# Altium PCB NiMH Battery Charger Rev.PcbDoc
Units mil, origin at the board's own origin, x right, y up, seen from the top; angles counter-clockwise.
Board outline 1574.8 x 1574.8 mil, 2 copper layers (Top Layer, Bottom Layer); 36 components, 25 nets, 108 pads, 29 vias.
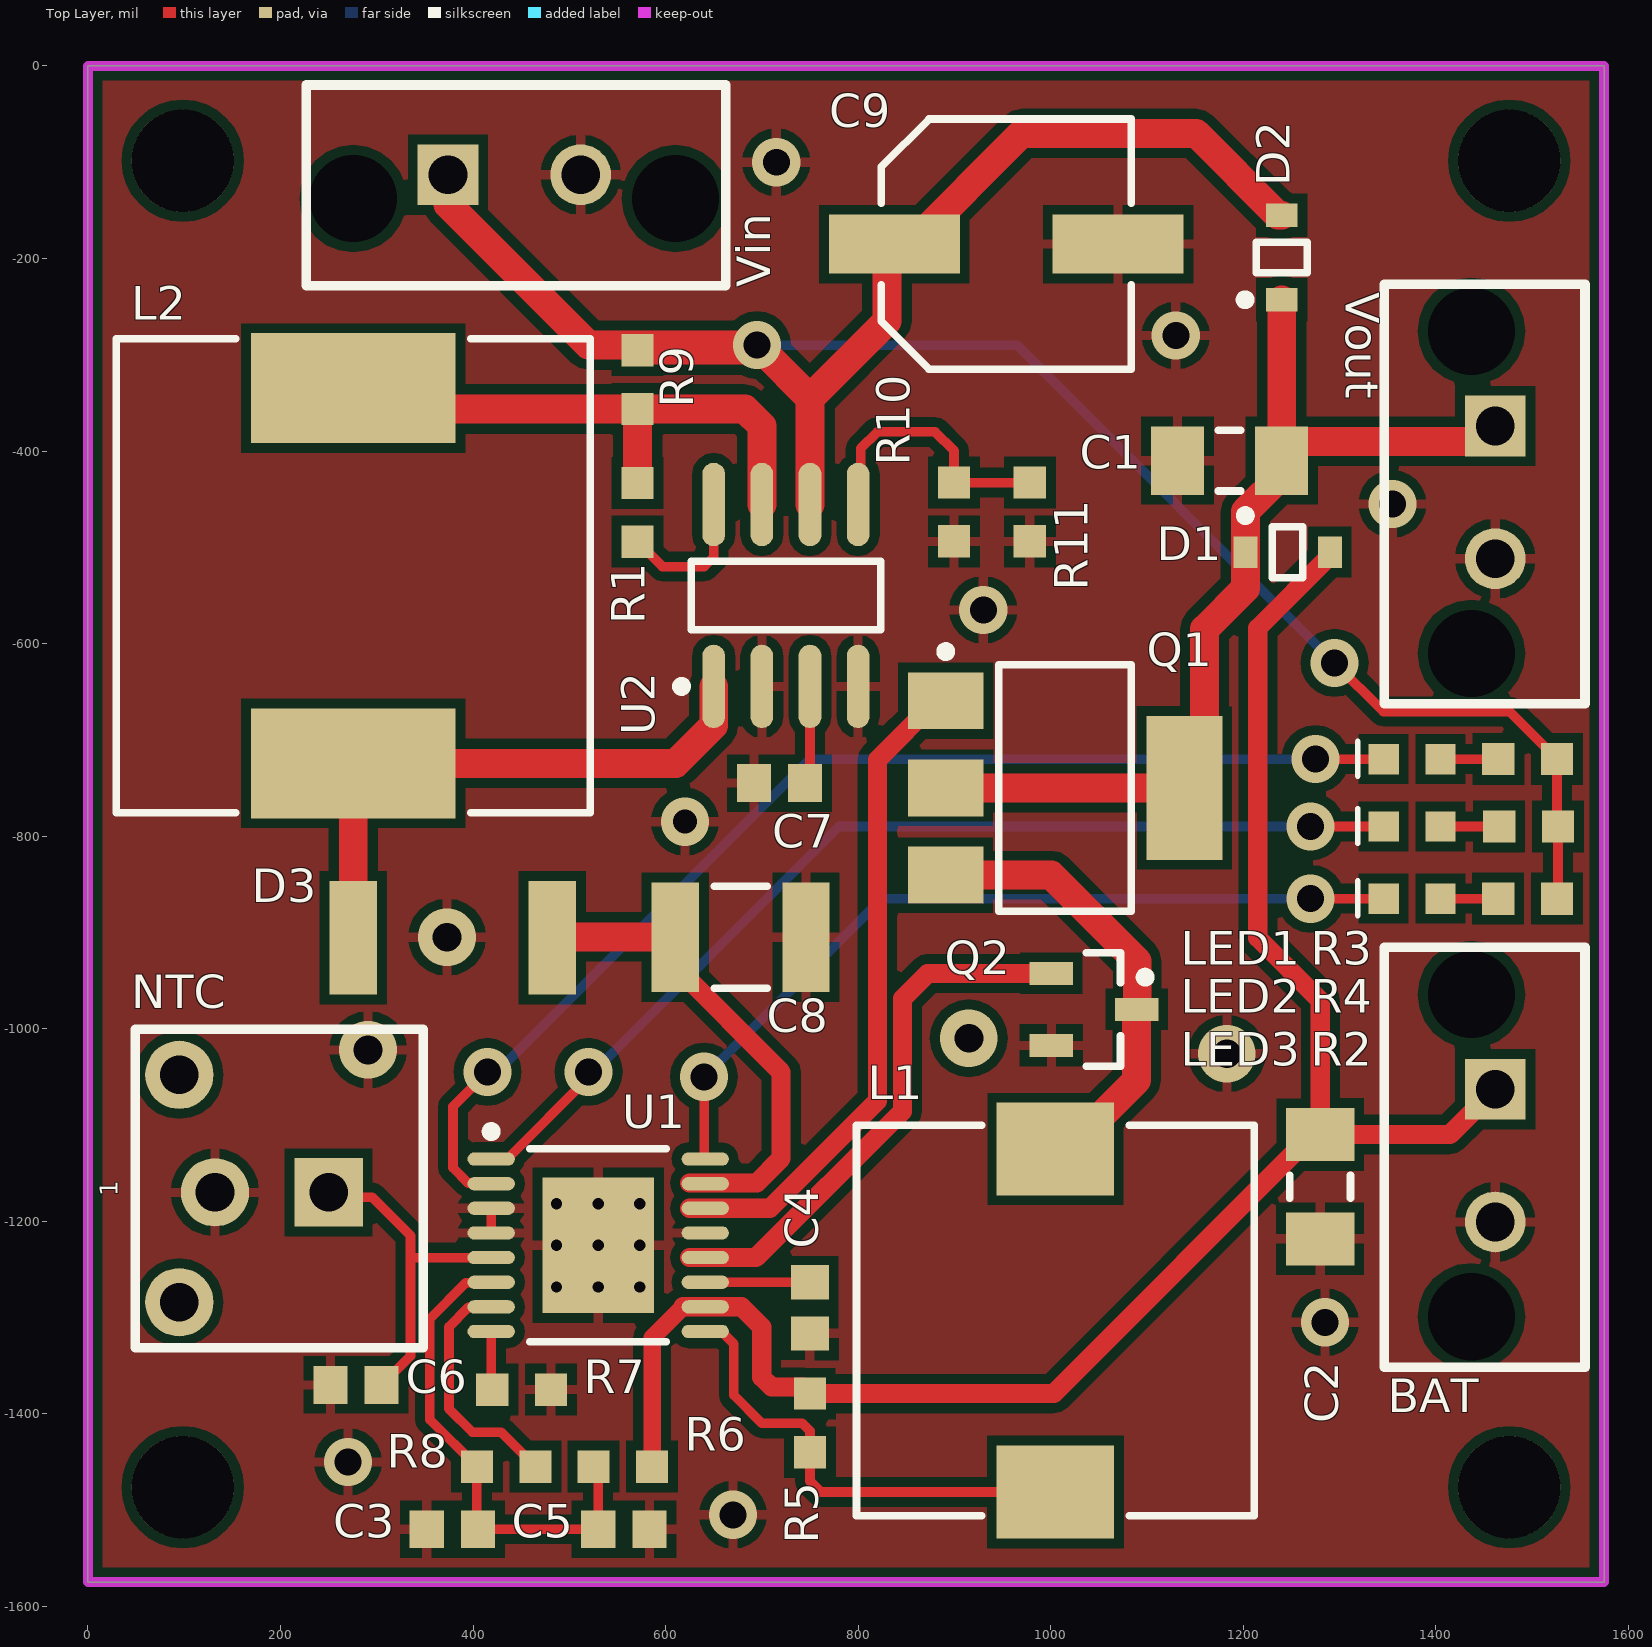
[diagram p0: Top Layer view]
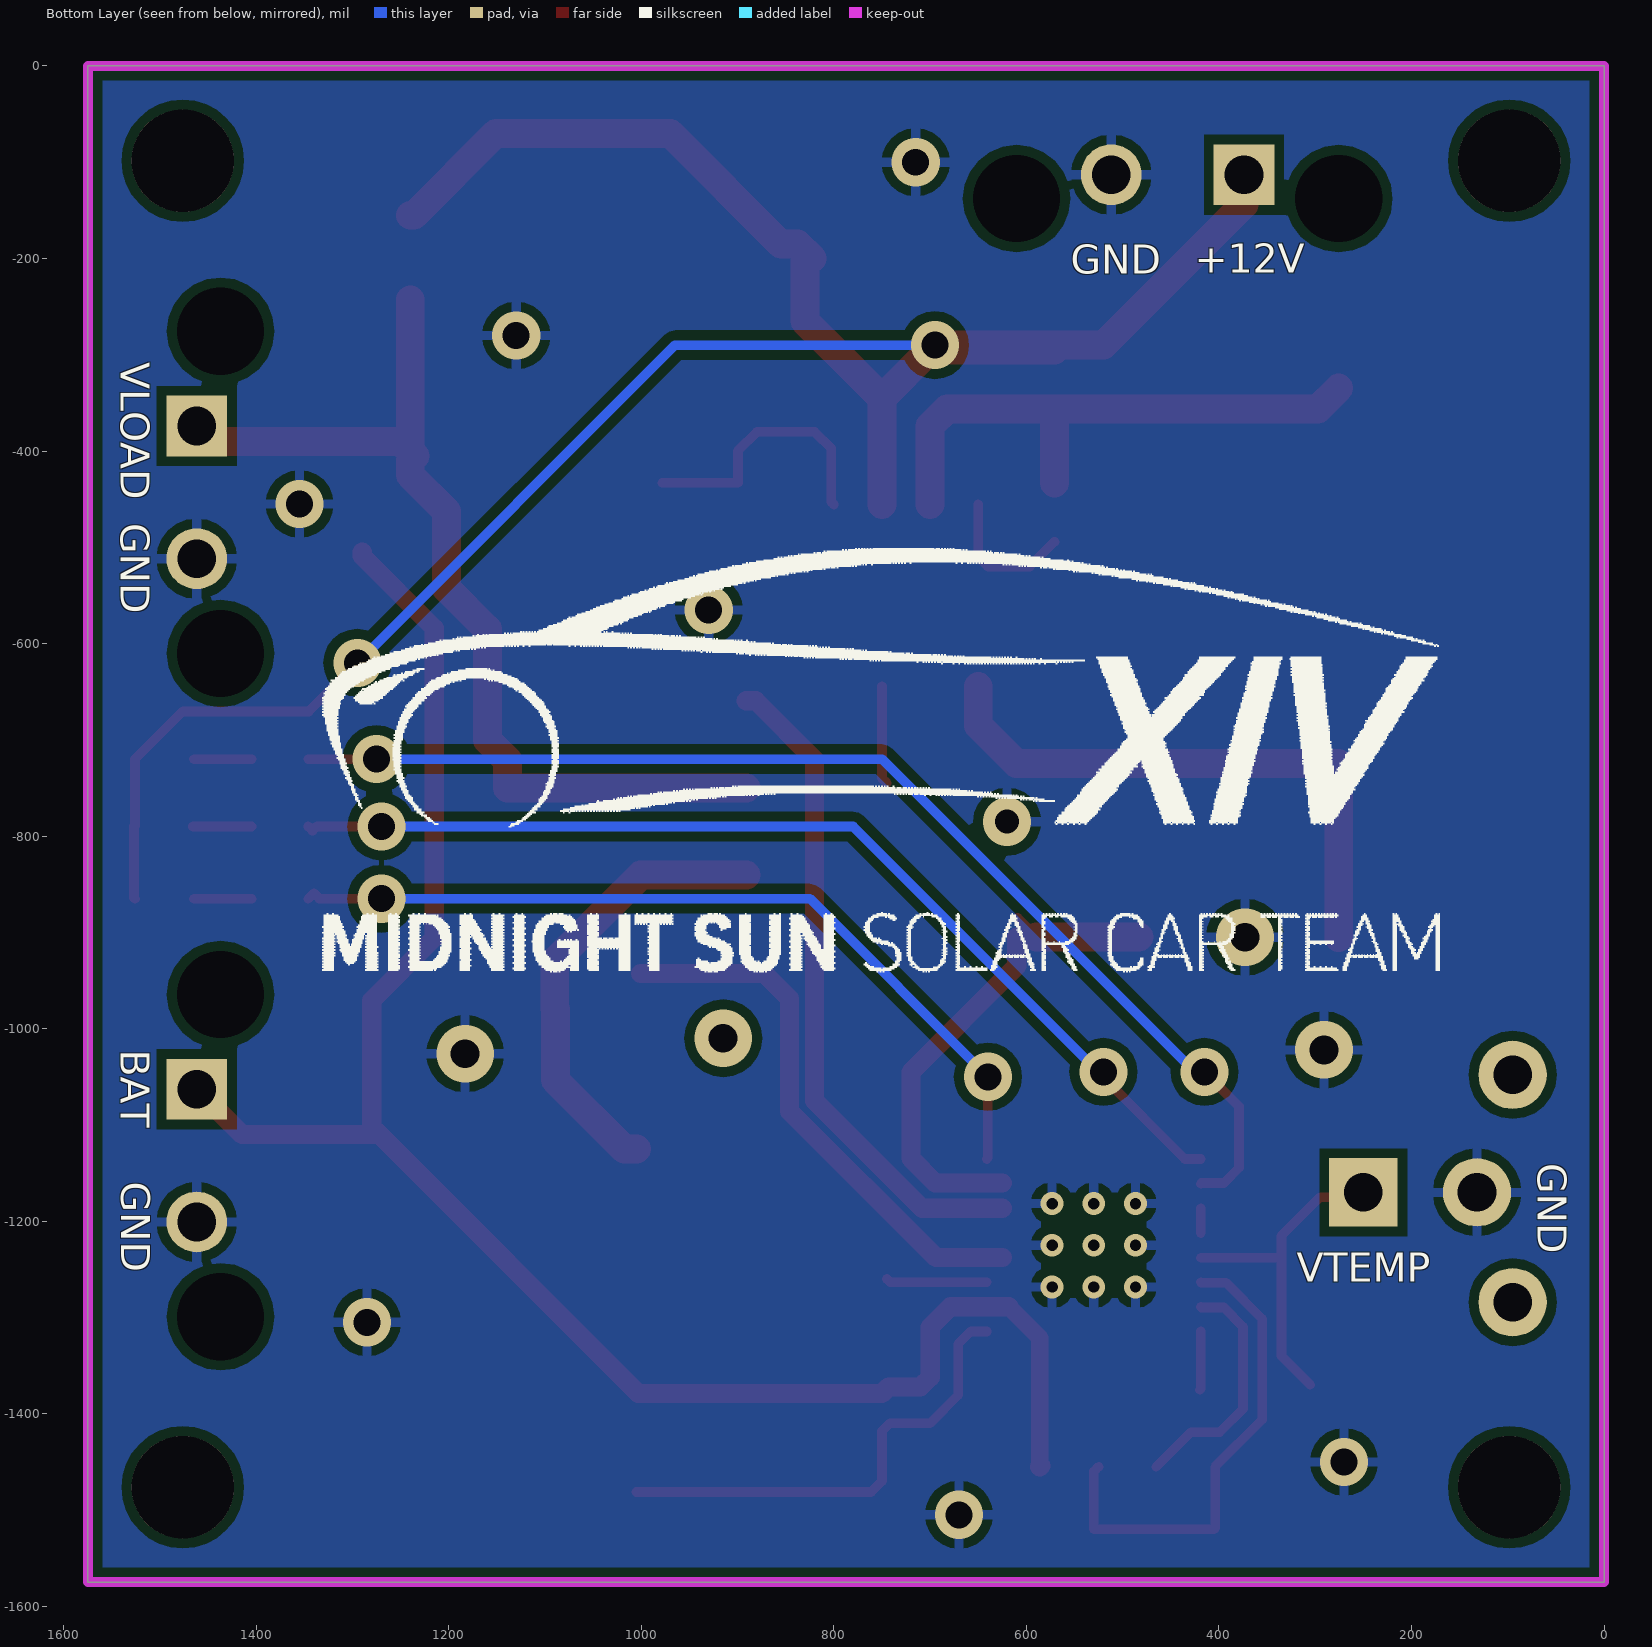
[diagram p1: Bottom Layer view, seen from below]
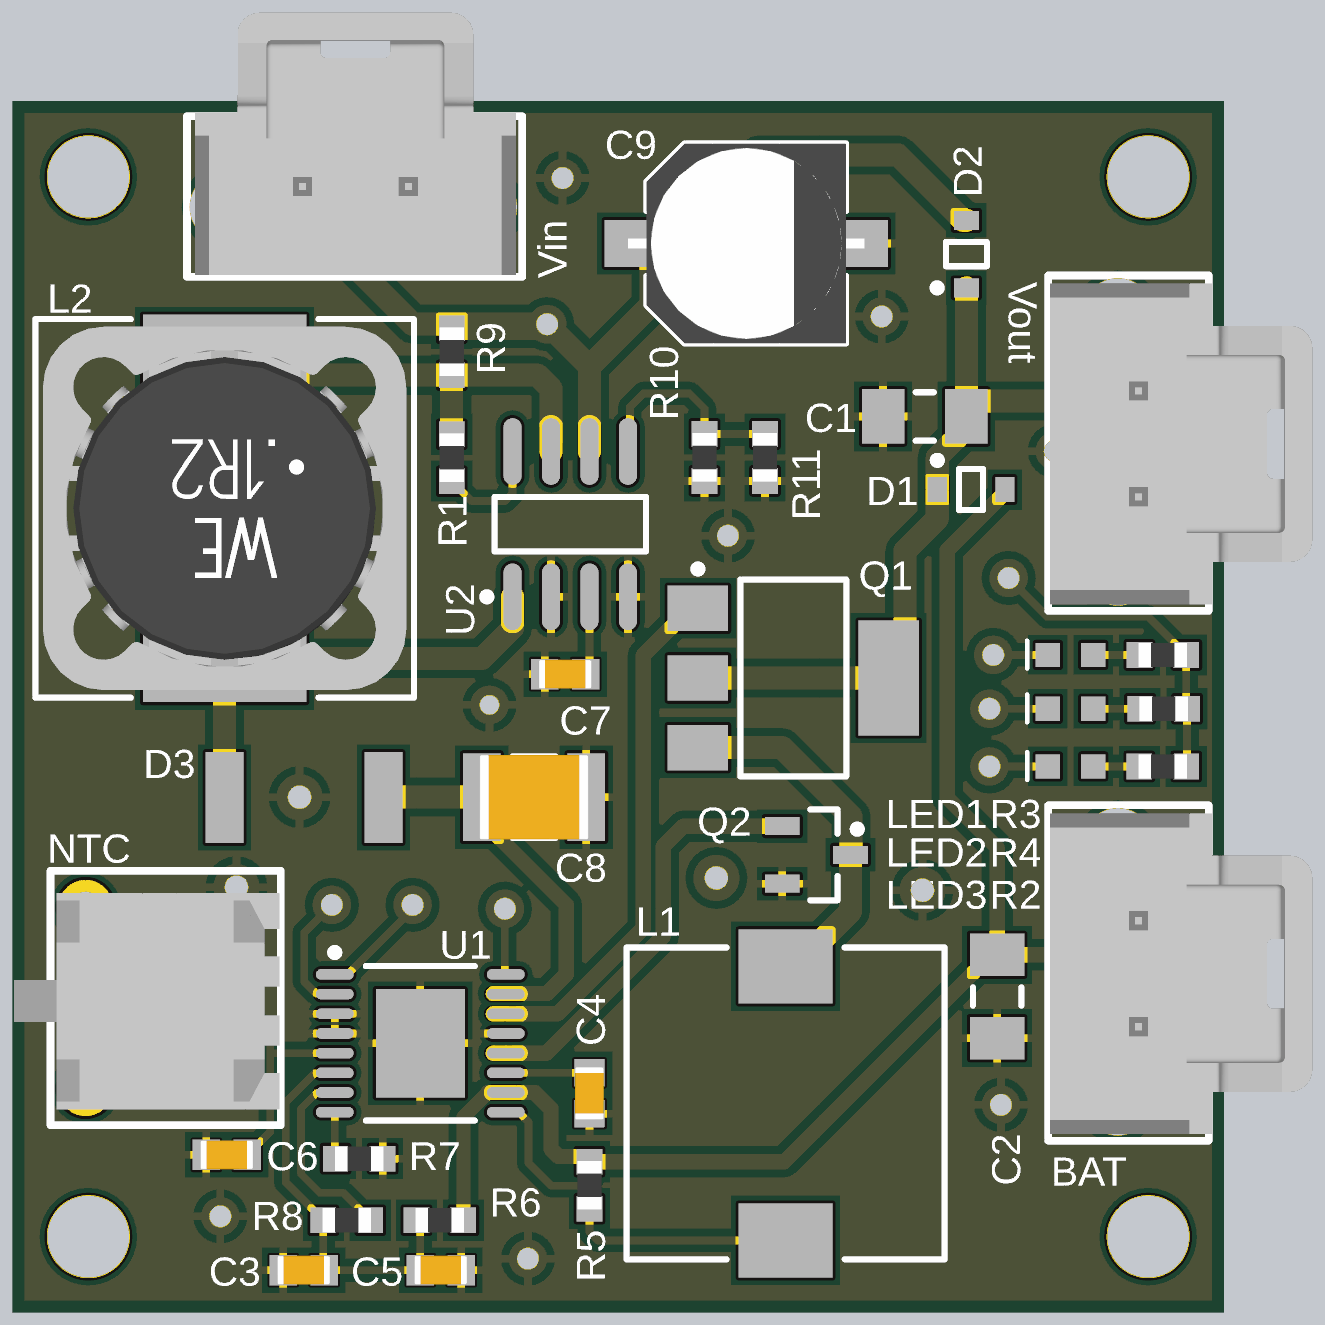
[diagram p2: 3D render of the assembled board from above, using the file's embedded part models]

## Layer stack, top to bottom
Top Solder: solder mask 0.4, Solder Resist, Dk 3.5
Top Layer: signal copper 1.4
Dielectric 1: dielectric 12.6, FR-4, Dk 4.8
Bottom Layer: signal copper 1.4
Bottom Solder: solder mask 0.4, Solder Resist, Dk 3.5

## Board outline
0,-1574.8 0,0 1574.8,0 1574.8,-1574.8

## Design rules (kind name [scope] priority, off if disabled: settings)
Clearance [All] p1: gap=10 ignorepadtopadclearanceinfootprint=FALSE except(0: Arc-Hole Track-Hole SMDPad-Hole THPad-Hole Via-Hole Fill-Hole Poly-Hole Region-Hole Text-Hole; 6: Arc-Arc Arc-Track Arc-SMDPad Track-Track Track-SMDPad SMDPad-SMDPad)
PolygonConnect [All] p1: connectstyle=Relief reliefconductorwidth=10 reliefentries=4 polygonreliefangle="90 Angle" airgapwidth=10
RoutingVias [All] p1: holewidth=28 width=50 viastyle="Through Hole" minholewidth=28 minwidth=50 maxholewidth=28 maxwidth=50
SolderMaskExpansion [All] p1: expansion=4
Width [All] p1: maxlimit=30 minlimit=10 preferedwidth=10 minimp=50.000000 maximp=50.000000 favimp=50.000000
30 further rules are at their usual default settings.

## Components (designator, comment, footprint, x,y, rotation, side; value= is the part's Value field where it differs from the comment)
BAT "CONN 2POS ULTRA-FIT 0.138\"" "CONN, 2POS ULTRA-FIT" 1461.81,-1062.99 r270 top (schematic designator P2)
C1 "CAP CER 10uF 50V 20% X5R 1206" "CAP, 1206" 1185.87,-410 r180 top
C2 "CAP CER 10uF 50V 20% X5R 1206" "CAP, 1206" 1280,-1164.13 r270 top
C3 "CAP CER 10nF 50V 5% X7R 0603" "CAP, 0603" 378.43,-1520 r180 top
C4 "CAP CER 0.1UF 50V 10% X7R 0603" "CAP, 0603" 750,-1290 r270 top
C5 "CAP CER 10nF 50V 5% X7R 0603" "CAP, 0603" 556.57,-1520 r0 top
C6 "68nF" "CAP, 0603" 278.43,-1370 r180 top
C7 "1500PF, 50V" "CAP, 0603" 718.43,-745 r180 top
C8 "CAP CER 330UF 6.3V X5R 1210" "CAP, 1210" 677.91,-905 r0 top
C9 "100UF" "CAP ALUM 6.3MM RADIAL SMD" 953.86,-185 r0 top
D1 "NSR1020MW2T3G" ONSC-SOD-323-2-477-02_V 1246.1,-505 r0 top
D2 "NSR1020MW2T3G" ONSC-SOD-323-2-477-02_V 1240,-198.9 r90 top
D3 "40V 1A" MELF 378.94,-905.51 r180 top
L1 "IND 10UH 2.8A 59 MOHM SMD" INDP100102X31N 1005,-1303.15 r270 top
L2 "180 µH" WE-PD-XL 275.59,-529.53 r270 top
LED1 "LED GREEN CLEAR 2V 0603" LED_0603 1403.03,-864.61 r180 top
LED2 "LED YELLOW CLEAR 2.1V 0603" LED_0603 1403.03,-719.61 r180 top
LED3 "LED RED CLEAR 2V 0603" LED_0603 1403.03,-789.61 r180 top
NTC "CONN 2POS MICRO-FIT 3mm" "CONN, 2POS MICRO-FIT" 250,-1166.06 r90 top (schematic designator P4)
Q1 "NTF2955T1G" ONSC-SOT-223-4-318E-04_V 1015,-750 r180 top
Q2 "20V 4A" SOT23 1045,-980 r0 top
R1 "180Ω" "RES, 0603" 570.87,-463.58 r90 top
R2 "RES 10K OHM 1% 1/10W 0603" "RES, 0603" 1495.43,-865.01 r180 top
R3 "RES 10K OHM 1% 1/10W 0603" "RES, 0603" 1495.51,-720 r180 top
R4 "RES 10K OHM 1% 1/10W 0603" "RES, 0603" 1496.46,-790.01 r180 top
R5 "0.05Ω" "RES, 0603" 750,-1409.49 r90 top
R6 "180k" "RES, 0603" 555.51,-1455 r0 top
R7 "49.9k" "RES, 0603" 450.51,-1375 r180 top
R8 "20k" "RES, 0603" 434.49,-1455 r180 top
R9 "0.22Ω" "RES, 0603" 570.87,-325.79 r270 top
R10 "2.21K" "RES, 0603" 899.57,-463.27 r270 top
R11 "47K" "RES, 0603" 978.31,-463.27 r270 top
U1 "LTC4010CFE#PBF" LT-FE-16-EPV-BC_L 530,-1225 r0 top
U2 "MC34063ACD-TR" SO8_N 725,-550 r90 top
Vin "CONN 2POS ULTRA-FIT 0.138\"" "CONN, 2POS ULTRA-FIT" 374.02,-112.99 r0 top (schematic designator P1)
Vout "CONN 2POS ULTRA-FIT 0.138\"" "CONN, 2POS ULTRA-FIT" 1461.81,-374.02 r270 top (schematic designator P3)

## Footprints (in the part's own frame and the unit in brackets; to place one, negate y for a bottom-side part, rotate by r counter-clockwise, add the part's x,y. Pads: shape width x height; smd on the part's side, far side on the other; paste and mask are expansions set on the pad)
"CAP ALUM 6.3MM RADIAL SMD" [mm] "Aluminum Electrolytic Capacitor, Body 6.50x6.50x5.50mm, IPC Low Density"
  rect 3.45x1.55 smd: 1(-2.95,0) 2(2.95,0)
  silkscreen extent -3.3,-3.3 3.3,3.3, body extent -3.9,-3.3 3.9,3.3, height 5.5
"CAP, 0603" [mm] "Chip Capacitor, 2-Leads, Body 1.60x0.81mm, IPC Medium Density"
  rect 0.9x1 smd mask+0.076: 1(-0.675,0) 2(0.675,0)
  body extent -0.87,-0.48 0.87,0.48, height 0.9
"CAP, 1206" [mm] "Chip Capacitor, 2-Leads, Body 3.20x1.60mm, IPC Medium Density"
  rect 1.4x1.8 smd: 1(-1.375,0) 2(1.375,0)
  silkscreen extent -0.3,-0.8 0.3,0.8, body extent -1.68,-0.87 1.67,0.87, height 1.8
"CAP, 1210" [mm] "Chip Capacitor, 2-Leads, Body 3.20x2.50mm, IPC Low Density"
  rect 1.25x2.9 smd: 1(-1.725,0) 2(1.725,0)
  silkscreen extent -0.7,-1.35 0.7,1.35, body extent -1.8,-1.4 1.8,1.4, height 2.8
"CONN, 2POS MICRO-FIT" [mm]
  round 1.8 hole 1.02: 0(-3,3.94) 0(3,3.94) 2(-0.1,3)
  rect 1.8x1.8 hole 1.02: 1(-0.1,0)
  silkscreen extent -4.2,-2.5 4.2,5.1, body extent -3.67,-2.47 3.48,6.3, height 9.95
"CONN, 2POS ULTRA-FIT" [mm] "2 Positions Header, Shrouded Connector 0.138\" (3.50mm) Through Hole Gold"
  rect 1.6x1.6 hole 1.02: 1(0,0)
  round 1.6 hole 1.02: 2(3.5,0)
  round 1.6 hole 2.3: ""(-2.5,-0.63) ""(6,-0.63)
  silkscreen extent -3.74,-2.93 7.33,2.37, body extent -3.48,-2.87 7.12,5.79, height 13.85
INDP100102X31N [mm] "Precision Wire Wound Inductor, 2-Leads, Body 10.00x10.20mm, IPC Medium Density"
  rect 2.45x3.1 smd: 1(-4.525,0) 2(4.525,0)
  silkscreen extent -5.15,-5.25 5.15,5.25, body extent -5.15,-5.25 5.15,5.25, height 3.1
LED_0603 [mm]
  rect 0.8x0.8 smd: 1(-0.05,0.01) 2(1.45,0.01)
  silkscreen extent 2.13,-0.46 2.13,0.45, body extent -0.09,-0.39 1.51,0.41, height 0.8
LT-FE-16-EPV-BC_L [mm] "SOP, 16-Leads, Body 5.1x4.5mm, Pitch 0.65mm, Thermal Pad 3.58x2.94mm, IPC High Density"
  oval 1.25x0.35 smd: 1(-2.825,2.275) 2(-2.825,1.625) 3(-2.825,0.975) 4(-2.825,0.325) 5(-2.825,-0.325) 6(-2.825,-0.975) 7(-2.825,-1.625) 8(-2.825,-2.275) 9(2.825,-2.275) 10(2.825,-1.625) 11(2.825,-0.975) 12(2.825,-0.325) 13(2.825,0.325) 14(2.825,0.975) 15(2.825,1.625) 16(2.825,2.275)
  rect 2.94x3.58 smd: 17(0,0)
  silkscreen extent -2.95,-2.55 1.8,3.12, body extent -2.25,-2.55 2.25,2.55, height 1.1
MELF [mm]
  rect 1.25x3 smd: 1(2.625,0) 2(-2.625,0)
ONSC-SOD-323-2-477-02_V [mm] "SOD, 2-Leads, Body 1.7x1.25mm"
  rect 0.63x0.83 smd: 1(-1.115,0) 2(1.115,0)
  silkscreen extent -1.24,-0.67 0.4,1.09, body extent -0.85,-0.63 0.85,0.63, height 1.06
ONSC-SOT-223-4-318E-04_V [mm] "SOT223, 4-Leads"
  rect 2x1.5 smd: 1(3.15,-2.3) 2(3.15,0) 3(3.15,2.3)
  rect 2x3.8 smd: 4(-3.15,0)
  silkscreen extent -1.75,-3.72 3.27,3.25, body extent -1.75,-3.25 1.75,3.25, height 1.75
"RES, 0603" [mm] "Chip Resistor, 2-Leads, Body 1.60x0.80mm, IPC Medium Density"
  rect 0.85x0.85 smd: 1(-0.775,0) 2(0.775,0)
  body extent -0.8,-0.4 0.8,0.4, height 0.55
SO8_N [mm] "SOIC, 8-Leads, Body 4.9x3.9mm, Pitch 1.27mm, IPC Medium Density"
  oval 2.2x0.6 smd: 1(-2.4,1.905) 2(-2.4,0.635) 3(-2.4,-0.635) 4(-2.4,-1.905) 5(2.4,-1.905) 6(2.4,-0.635) 7(2.4,0.635) 8(2.4,1.905)
  silkscreen extent -2.52,-2.5 0.9,2.88, body extent -2,-2.5 2,2.5, height 1.75
SOT23 [mm] "SOT23, 3-Leads, Body 2.9x1.3mm, Pitch 0.95mm, Lead Span 2.3mm - Reverse Pinning, IPC Medium Density"
  rect 1.15x0.6 smd: 1(1.125,0) 2(-1.125,-0.95) 3(-1.125,0.95)
  silkscreen extent -0.2,-1.5 1.48,1.5, body extent -0.7,-1.5 0.7,1.5, height 1.1
WE-PD-XL [mm] "SMD Inductor, 2-Leads, Body 12.0 x 12.0 mm"
  rect 2.9x5.4 smd: 1(-4.95,0) 2(4.95,0)
  silkscreen extent -6.25,-6.25 6.25,6.25, body extent -6,-6 6,6, height 7.99

## Part data
BAT Vin Vout: "Connector Header Through Hole 2 position 0.138\" (3.50mm)", Color=Black, Manufacturer=Molex, Manufacturer Part Number=1722871102, Supplier Part Number 1=WM11701-ND, ComponentLink1Description=http://www.molex.com/pdm_docs/sd/1722861302_sd.pdf, ComponentLink1URL=http://www.molex.com/pdm_docs/sd/1722861302_sd.pdf, Connector Type="Male Pin", Contact Plating=Tin, Fastening Type=Latch, Mount="Through Hole", Number of Positions=2, Number of Rows=1, Packaging=Tray, Pitch=0.138inch, Pricing 1="1 = 0.78000, 10 = 0.68800, 100 = 0.59380, 500 = 0.48582, 1000 = 0.43184, 5000 = 0.37786, 10000 = 0.35897 (USD)", RoHS=Yes, Series=UltraFit, Stock 1=2743, Supplier 1=Digi-Key, Termination=Solder
C1 C2: "10μF ±20% 50V Ceramic Capacitor X5R 1206 (3216 Metric)", Capacitance="10 uF", Case/Package=1206, Case Code (Metric)=3216, Manufacturer=Murata, Manufacturer Part Number=GRT31CR61H106ME01L, Max Operating Temperature=85°C, Min Operating Temperature=-55°C, Rating=X5R, Ratings=AEC-Q200, Supplier Part Number 1=490-12457-1-ND, Tolerance=20%, Voltage Rating=50V, Case Code (Imperial)=1206, Length=0.126inch, Mount="Surface Mount", Packaging="Tape and Reel", Pricing 1="1 = 0.57000, 10 = 0.39800, 100 = 0.23910, 500 = 0.17930, 1000 = 0.15141 (USD)", RoHS=Yes, Stock 1=449467, Supplier 1=Digi-Key, Thickness=0.071inch, Width=0.063inch
C3 C5: "10000pF ±5% 50V Ceramic Capacitor U2J 0603 (1608 Metric)", Capacitance=10000pF, Manufacturer 1=KEMET, Manufacturer Part Number 1=C0603C103J5JAC7867, Operating Temperature="-55°C ~ 125°C", Package / Case="0603 (1608 Metric)", Ratings=-, Supplier Part Number 1=399-13384-1-ND, Temperature Coefficient=U2J, Tolerance=±5%, Voltage=50V, ComponentLink1Description=http://www.kemet.com/docfinder?Partnumber=C0603C103J5JAC7867, ComponentLink1URL=http://www.kemet.com/docfinder?Partnumber=C0603C103J5JAC7867, Failure Rate=-, Height - Seated (Max)=-, Lead Spacing=-, Lead Style=-, Mounting Type="Surface Mount, MLCC", Packaging="Cut Tape (CT)", Part Status=Active, Size / Dimension="0.063\" L x 0.032\" W (1.60mm x 0.80mm)", Supplier 1=Digi-Key, Thickness (Max)="0.034\" (0.87mm)"
C4: "0.10μF ±10% 50V Ceramic Capacitor X7R 0603 (1608 Metric)", Capacitance=0.1μF, Manufacturer 1="AVX Corporation", Manufacturer Part Number 1=06035C104KAT2A, Operating Temperature="-55°C ~ 125°C", Package / Case="0603 (1608 Metric)", Ratings=-, Supplier Part Number 1=478-5052-1-ND, Temperature Coefficient=X7R, Tolerance=±10%, Voltage=50V, ComponentLink1Description=http://datasheets.avx.com/X7RDielectric.pdf, ComponentLink1URL=http://datasheets.avx.com/X7RDielectric.pdf, Height - Seated (Max)=-, Lead Spacing=-, Lead Style=-, Mounting Type="Surface Mount, MLCC", Packaging="Cut Tape (CT)", Part Status=Active, Size / Dimension="0.063\" L x 0.032\" W (1.60mm x 0.81mm)", Supplier 1=Digi-Key, Thickness (Max)="0.035\" (0.90mm)"
C6: library part "CAP CER 0.068UF 10% 50V X7R 0603", "0.068μF 50V Ceramic Capacitor X7R 0603 (1608 Metric) 0.063\" L x 0.032\" W (1.60mm x 0.80mm)", Case/Package=0603, Case Code (Metric)=1608, Dielectric=X7R, Manufacturer=Murata, Manufacturer Part Number=GCM188R71H683KA57D, Max Operating Temperature=125°C, Min Operating Temperature=-55°C, Package Quantity=4000, Supplier Part Number 1=490-8027-1-ND, Tolerance=10%, Voltage Rating=50V, Capacitance=68nF, Case Code (Imperial)=0603, ComponentLink1Description=https://datasheet.ciiva.com/29542/s0717e-29542427.pdf, ComponentLink1URL=https://datasheet.ciiva.com/29542/s0717e-29542427.pdf, ComponentLink2Description=https://datasheet.ciiva.com/29542/s0717e-29542428.pdf, ComponentLink2URL=https://datasheet.ciiva.com/29542/s0717e-29542428.pdf, ComponentLink3Description=https://datasheet.ciiva.com/29542/s0717e-29542429.pdf, ComponentLink3URL=https://datasheet.ciiva.com/29542/s0717e-29542429.pdf, Depth=0.8mm, Height=0.8mm, Length=1.6mm, Mount="Surface Mount", Packaging="Tape and Reel", Pricing 1="1=0.16, 10=0.116, 100=0.0547, 500=0.03832, 1000=0.03172 (USD)", Radiation Hardening=No, Stock 1=40000, Supplier 1=Digi-Key, Termination=SMD/SMT, Thickness=0.035inch, Voltage Rating (DC)=50V, Width=0.031inch
C7: library part "CAP, 1500PF, 50V, 10%, X7R, 0603", "KEMET - C0603C152K5RACTU - CAP, 1500PF, 50V, 10%, X7R, 0603", Capacitance=1.5nF, Case/Package=0603, Case Code (Metric)=1608, Dielectric=X7R, Dielectric Material=Ceramic, Manufacturer 1=KEMET, Manufacturer Part Number 1=C0603C152K5RACTU, Max Operating Temperature=125°C, Min Operating Temperature=-55°C, Package Quantity=1, Tolerance=10%, Voltage=50V, Case Code (Imperial)=0603, ComponentLink1Description=https://datasheet.ciiva.com/7824/kem-c1002-x7r-smd-7824006.pdf?src-supplier=Element14, ComponentLink1URL=https://datasheet.ciiva.com/7824/kem-c1002-x7r-smd-7824006.pdf?src-supplier=Element14, ComponentLink2Description=https://datasheet.ciiva.com/28645/1851736-28645673.pdf?src-supplier=Element14, ComponentLink2URL=https://datasheet.ciiva.com/28645/1851736-28645673.pdf?src-supplier=Element14, ComponentLink3Description=https://datasheet.ciiva.com/7823/40889-7823642.pdf?src-supplier=Element14, ComponentLink3URL=https://datasheet.ciiva.com/7823/40889-7823642.pdf?src-supplier=Element14, ComponentLink4Description=https://datasheet.ciiva.com/18192/getdatasheetpartid-104358-18192810.pdf?src-supplier=Verical, ComponentLink4URL=https://datasheet.ciiva.com/18192/getdatasheetpartid-104358-18192810.pdf?src-supplier=Verical, ComponentLink5Description=https://datasheet.ciiva.com/7823/40889-7823643.pdf?src-supplier=Element14, ComponentLink5URL=https://datasheet.ciiva.com/7823/40889-7823643.pdf?src-supplier=Element14, ComponentLink6Description=https://datasheet.ciiva.com/6177/kem-c1002-x7r-smd-6177916.pdf?src-supplier=Farnell, ComponentLink6URL=https://datasheet.ciiva.com/6177/kem-c1002-x7r-smd-6177916.pdf?src-supplier=Farnell, ComponentLink7Description=https://datasheet.ciiva.com/14597/70095383-14597806.pdf?src-supplier=Allied+Electronics, ComponentLink7URL=https://datasheet.ciiva.com/14597/70095383-14597806.pdf?src-supplier=Allied+Electronics, Contact Plating=Tin,Matte, Depth=0.8mm, Dissipation Factor=2.5%, Height=0.8mm, Lead Pitch=0.7mm, Length=1.6mm, Mount="Surface Mount,PCB", Number of Pins=2, Packaging="Tape and Reel", Pricing 1="1=0.10000, 10=0.05000, 100=0.02230, 500=0.01594, 1000=0.01252 (USD)", Radiation Hardening=No, REACH SVHC="No SVHC", RoHS=Yes, Stock 1=207623, Supplier 1=Digi-Key, Termination=SMD/SMT, Thickness=0.034inch, Voltage Rating=50V, Voltage Rating (DC)=50V, Width=0.8mm
C8: "330μF ±20% 6.3V Ceramic Capacitor X5R 1210 (3225 Metric)", Manufacturer="Taiyo Yuden", Manufacturer Part Number=JMK325ABJ337MM-P, Supplier Part Number 1=587-5449-1-ND, Pricing 1="1=5.57, 10=4.492, 100=3.5039, 500=2.6055 (USD)", Stock 1=1427, Supplier 1=Digi-Key
C9: library part "CAP ALUM 100UF 20% 35V SMD", "100μF 35V Aluminum Electrolytic Capacitors Radial, Can - SMD 2000 Hrs @ 85°C", Capacitance=100uF, Case/Package=Radial, Leakage Current=3uA, Manufacturer 1=Panasonic, Manufacturer Part Number 1=EEE-1VA101XP, Max Operating Temperature=85°C, Min Operating Temperature=-40°C, Package Quantity=900, Ripple Current=132mA, Supplier Part Number 1=PCE3951CT-ND, Tolerance=20%, Voltage=35V, ComponentLink1Description=https://datasheet.ciiva.com/46378/aba0000ce2-46378341.pdf, ComponentLink1URL=https://datasheet.ciiva.com/46378/aba0000ce2-46378341.pdf, ComponentLink2Description=https://datasheet.ciiva.com/17535/aba0000ce2-17535510.pdf, ComponentLink2URL=https://datasheet.ciiva.com/17535/aba0000ce2-17535510.pdf, ComponentLink3Description=https://datasheet.ciiva.com/30170/11aba0000ce2-30170103.pdf, ComponentLink3URL=https://datasheet.ciiva.com/30170/11aba0000ce2-30170103.pdf, ComponentLink4Description=https://datasheet.ciiva.com/31414/aba0000ce2-31414696.pdf, ComponentLink4URL=https://datasheet.ciiva.com/31414/aba0000ce2-31414696.pdf, ComponentLink5Description=https://datasheet.ciiva.com/24068/aba0000ce2-40801-24068089.pdf, ComponentLink5URL=https://datasheet.ciiva.com/24068/aba0000ce2-40801-24068089.pdf, ComponentLink6Description=https://datasheet.ciiva.com/14591/70255710-14591771.pdf, ComponentLink6URL=https://datasheet.ciiva.com/14591/70255710-14591771.pdf, ComponentLink7Description=https://datasheet.ciiva.com/14600/70255710-14600731.pdf, ComponentLink7URL=https://datasheet.ciiva.com/14600/70255710-14600731.pdf, ComponentLink8Description=https://datasheet.ciiva.com/46374/aba0000ce2-46374427.pdf, ComponentLink8URL=https://datasheet.ciiva.com/46374/aba0000ce2-46374427.pdf, ComponentLink9Description=https://datasheet.ciiva.com/11673/aba0000ce2-11673887.pdf, ComponentLink9URL=https://datasheet.ciiva.com/11673/aba0000ce2-11673887.pdf, Contact Plating=Tin, Description 1="Cap Aluminum Lytic 100uF 35V 20% (6.3 X 7.7mm) SMD 132mA 2000h 85C Automotive T/R", Diameter=6.3mm, Height=7.7mm, Height - Seated (Max)=0.303inch, Lead Free="Lead Free", Length=8mm, Life (Hours)=2000Hour, Mount="Surface Mount,PCB", Number of Pins=8, Packaging="Tape and Reel", Polarity=Polar, Pricing 1="1=0.44, 10=0.304, 100=0.1822 (USD)", Radiation Hardening=No, REACH SVHC="No SVHC", Ripple Current (AC)=132mA, Stock 1=170823, Supplier 1=Digi-Key, Termination=SMD/SMT, Voltage Rating=35V, Voltage Rating (DC)=35V
D1 D2: library part CMP-1055-00469-1, "Schottky Barrier Diode, 2-Pin SOD-323, Pb-Free, Tape and Reel", Manufacturer="On Semiconductor", ComponentLink1Description="Manufacturer URL", ComponentLink1URL=http://www.onsemi.com/, ComponentLink2Description=Datasheet, ComponentLink2URL=http://www.onsemi.cn/pub_link/Collateral/NSR1020MW2T1-D.PDF, ComponentLink3Description="Package Specification", ComponentLink3URL=http://www.onsemi.com/pub_link/Collateral/477-02.PDF.1, Configuration=Single, DatasheetVersion="Rev. 1", IFSM Max (A)=5, Mounting Technology="Surface Mount", PackageDescription="2-Pin SOD, Body 1.7 x 1.25 mm", PackageReference=SOD-323-2-477-02, PackageVersion="Rev. H, 03/2007", Packing="Tape and Reel", PartNumber=NSR1020MW2T3G, RoHS=TRUE
D3: library part "DIODE SCHOTTKY 40V 1A MELF", "Diode Schottky 40V 1A Surface Mount MELF"
L1: "10μH Shielded Inductor 2.8A 59 mOhm Max Nonstandard", Case/Package=Nonstandard, Current Rating=2.8A, DC Resistance (DCR)=59mR, Inductance=10uh, Manufacturer=Sumida, Manufacturer Part Number=CDRH103RNP-100NC-B, Max Operating Temperature=100°C, Min Operating Temperature=-40°C, Package Quantity=1000, Saturation Current=3.18A, Supplier Part Number 1=308-1910-1-ND, Test Frequency=100kHz, Tolerance=30%, ComponentLink1Description=http://www.mouser.com/ds/2/390/CDRH103R-523372.pdf, ComponentLink1URL=http://www.mouser.com/ds/2/390/CDRH103R-523372.pdf, ComponentLink2Description=http://www.sumida.com/products/pdf/CDRH103R.pdf, ComponentLink2URL=http://www.sumida.com/products/pdf/CDRH103R.pdf, ComponentLink3Description=http://products.sumida.com/products/pdf/CDRH103R.pdf, ComponentLink3URL=http://products.sumida.com/products/pdf/CDRH103R.pdf, Core Material=Ferrite, Depth=10.3mm, Height=3.1mm, Height - Seated (Max)=0.122inch, Lead Free="Lead Free", Length=0.402inch, Max DC Current=2.8A, Mount="Surface Mount", Packaging="Tape and Reel", Pricing 1="1=1.53, 10=1.42, 100=1.027, 500=0.7866 (USD)", Radiation Hardening=No, Shielding=Shielded, Stock 1=69, Supplier 1=Digi-Key, Termination=SMD/SMT, Width=0.394inch
L2: library part "IND 180 μH Power Inductor", "SMD-Shielded Power Inductor WE-PD, L = 180 μH", Inductance="180 ?μH", ComponentLink1Description="Manufacturer Link", ComponentLink1URL=http://www.we-online.com, ComponentLink2Description=Datasheet, ComponentLink2URL=http://www.we-online.de/katalog/media/pdf/744770218.pdf, DatasheetVersion="ver 5, Oct-2004", PackageDescription="SMD Inductor, 2-Leads, Body 12.0 x 12.0 mm", PackageReference=WE-PD-XL, PackageVersion=2004
LED1: "Green 572nm LED Indication - Discrete 2V 0603 (1608 Metric)", Color=Green, Current - Test=20mA, Lens Color=Colorless, Manufacturer="Wurth Electronics Inc.", Manufacturer Part Number=150060VS75000, Millicandela Rating=40mcd, Package / Case="0603 (1608 Metric)", Supplier Device Package=0603, Supplier Part Number 1=732-4980-1-ND, Voltage - Forward (Vf) (Typ)=2V, Category=Optoelectronics, ComponentLink1Description=http://katalog.we-online.de/led/datasheet/150060VS75000.pdf, ComponentLink1URL=http://katalog.we-online.de/led/datasheet/150060VS75000.pdf, Features=-, Height (Max)=0.80mm, Lens Style/Size="Rectangle with Flat Top, 1.10mm x 0.70mm", Lens Transparency=Clear, Mounting Type="Surface Mount", Packaging="Cut Tape (CT)", Part Status=Active, Pricing 1="1=0.21, 100=0.1617, 500=0.13964 (CAD)", RoHS="RoHS Compliant", Size / Dimension="1.60mm L x 0.80mm W", Stock 1=9408, Supplier 1=Digi-Key, Viewing Angle=140¡ã, Wavelength - Dominant=570nm, Wavelength - Peak=572nm
LED2: "Yellow 590nm LED Indication - Discrete 2V 0603 (1608 Metric)", Color=Yellow, Current - Test=20mA, Lens Color=Colorless, Manufacturer="Wurth Electronics Inc.", Manufacturer Part Number=150060YS75000, Millicandela Rating=120mcd, Package / Case="0603 (1608 Metric)", Supplier Device Package=0603, Supplier Part Number 1=732-4981-1-ND, Voltage - Forward (Vf) (Typ)=2V, Category=Optoelectronics, ComponentLink1Description=http://katalog.we-online.de/led/datasheet/150060YS75000.pdf, ComponentLink1URL=http://katalog.we-online.de/led/datasheet/150060YS75000.pdf, Features=-, Height (Max)=0.80mm, Lens Style/Size="Rectangle with Flat Top, 1.10mm x 0.70mm", Lens Transparency=Clear, Mounting Type="Surface Mount", Packaging="Cut Tape (CT)", Part Status=Active, Pricing 1="1=0.21, 100=0.1617, 500=0.13964 (CAD)", RoHS="RoHS Compliant", Size / Dimension="1.60mm L x 0.80mm W", Stock 1=10523, Supplier 1=Digi-Key, Viewing Angle=140¡ã, Wavelength - Dominant=590nm, Wavelength - Peak=595nm
LED3: "Red 631nm LED Indication - Discrete 2V 0603 (1608 Metric)", Color=Red, Current - Test=20mA, Lens Color=Colorless, Manufacturer="Wurth Electronics Inc.", Manufacturer Part Number=150060RS75000, Millicandela Rating=250mcd, Package / Case="0603 (1608 Metric)", Supplier Device Package=0603, Supplier Part Number 1=732-4978-1-ND, Voltage - Forward (Vf) (Typ)=2V, Category=Optoelectronics, ComponentLink1Description=http://katalog.we-online.de/led/datasheet/150060RS75000.pdf, ComponentLink1URL=http://katalog.we-online.de/led/datasheet/150060RS75000.pdf, Features=-, Height (Max)=0.80mm, Lens Style/Size="Rectangle with Flat Top, 1.10mm x 0.70mm", Lens Transparency=Clear, Mounting Type="Surface Mount", Packaging="Cut Tape (CT)", Part Status=Active, Pricing 1="1=0.21, 100=0.1617, 500=0.13964 (CAD)", RoHS="RoHS Compliant", Size / Dimension="1.60mm L x 0.80mm W", Stock 1=35521, Supplier 1=Digi-Key, Viewing Angle=140¡ã, Wavelength - Dominant=625nm, Wavelength - Peak=630nm
NTC: "Connector Header Through Hole 2 position", Contact Resistance=10mR, Current Rating=5A, Housing Colour=Black, Manufacturer=Molex, Manufacturer Part Number=43045-0227, Max Operating Temperature=105°C, Max Voltage Rating (DC)=250.25kV, Min Operating Temperature=-40°C, Package Quantity=3168, Supplier Part Number 1=WM10657-ND, Voltage Rating=600V, ComponentLink1Description=http://www.onlinecomponents.com/productFiles/mf-MOL/307170430450227_pcb_headers.pdf, ComponentLink1URL=http://www.onlinecomponents.com/productFiles/mf-MOL/307170430450227_pcb_headers.pdf, ComponentLink2Description=http://www.mouser.com/ds/2/276/0430450227_PCB_HEADERS-142611.pdf, ComponentLink2URL=http://www.mouser.com/ds/2/276/0430450227_PCB_HEADERS-142611.pdf, ComponentLink3Description=http://uk.rs-online.com/webdocs/13c3/0900766b813c3a46.pdf, ComponentLink3URL=http://uk.rs-online.com/webdocs/13c3/0900766b813c3a46.pdf, ComponentLink4Description=http://www.molex.com/webdocs/datasheets/pdf/en-us/0430450227_PCB_HEADERS.pdf, ComponentLink4URL=http://www.molex.com/webdocs/datasheets/pdf/en-us/0430450227_PCB_HEADERS.pdf, Contact Material=Brass, Contact Plating=Tin, Depth=8.77mm, Gender=Male, Glow Wire Compliant=Compliant, Halogen Free="Low Halogen", Housing Material=Thermoplastic, Length=7.15mm, Mount="Through Hole", Number of Circuits=2, Number of Contacts=2, Number of Ports=1, Number of Positions=2, Number of Rows=2, Number of Terminals=2, Orientation=Vertical, Packaging=Tray, Pitch=3mm, Pricing 1="1=0.84, 10=0.74, 25=0.6968, 50=0.6676, 100=0.6387, 250=0.5806, 500=0.52254, 1000=0.46448, 2500=0.42094 (USD)", Radiation Hardening=No, Row Spacing=3mm, Stock 1=3657, Supplier 1=Digi-Key, Termination=Solder
Q1: library part ONSC-PMOS-G1D2S3D4-4, "Power MOSFET, -60 V, -2.6 A, Single P-Channel, 4-Pin SOT-223, Pb-Free, Tape and Reel", Manufacturer="On Semiconductor", Package Type="SOT-223-4 / TO-261-4", Channel Polarity="P Channel", Ciss Typ (pF)=492, ComponentLink1Description="Manufacturer URL", ComponentLink1URL=http://www.onsemi.com/, ComponentLink2Description=Datasheet, ComponentLink2URL=http://www.onsemi.com/pub_link/Collateral/NTF2955-D.PDF, ComponentLink3Description="Package Specification", ComponentLink3URL=http://www.onsemi.com/pub_link/Collateral/318E-04.PDF, Configuration=Single, Coss Typ (pF)=165, Crss Typ (pF)=50, DatasheetVersion="Rev. 6", ID Max (A)=2.6, Mounting Technology="Surface Mount", PackageDescription="4-Pin Small Outline Transistor, Body 6.5 x 3.5 mm, Pitch 2.3 mm", PackageReference=SOT-223-4-318E-04, PackageVersion="Rev. N, 08/2009", Packing="Tape and Reel", PartNumber=NTF2955T1G, Qrr Typ (nC)=0.139, RoHS=Pb-Free, V(BR)DSS Min (V)=60, VGS(th) Max (V)=4, VGS Max (V)=20
Q2: library part "MOSFET N-CHANNEL 20V 4A SOT23F", "N-Channel 20V 4A (Ta) 1W (Ta) Surface Mount SOT-23F", Supplier Part Number 1=SSM3K345RLFCT-ND, ComponentLink1Description=datasheet, ComponentLink1URL=https://toshiba.semicon-storage.com/info/docget.jsp?did=55842&prodName=SSM3K345R, Supplier 1=Digi-Key
R1 R9: library part "RES 180k Ohms", Manufacturer="Vishay Dale", Part Number=CRCW0402180KFKED, Supplier 1=Digi-Key
R2 R3 R4: "RES SMD 10K OHM 1% 1/10W 0603", Manufacturer 1=Yageo, Manufacturer Part Number 1=RC0603FR-0710KL, Operating Temperature="-55°C ~ 155°C", Package / Case="0603 (1608 Metric)", Power=1/10W, Resistance=10k, Supplier Device Package=0603, Supplier Part Number 1=311-10.0KHRCT-ND, Temperature Coefficient=±100ppm/°C, Tolerance=±1%, ComponentLink1Description=http://www.yageo.com/documents/recent/PYu-RC_Group_51_RoHS_L_7.pdf, ComponentLink1URL=http://www.yageo.com/documents/recent/PYu-RC_Group_51_RoHS_L_7.pdf, Composition="Thick Film", Failure Rate=-, Height - Seated (Max)="0.022\" (0.55mm)", Packaging="Cut Tape (CT)", Part Status=Active, Size / Dimension="0.063\" L x 0.031\" W (1.60mm x 0.80mm)", Supplier 1=Digi-Key
R5: library part RES-2, "Chip Resistor, 50 mOhm, +/- 1%, 1 W, -65 to 170 degC, 2512 (6432 Metric), RoHS, Tape and Reel", Manufacturer=Vishay, Package Description="2-Pin Surface Mount Device, Body 6.35 x 3.18 mm", Package Reference=2512, Power Rating=1W, Resistance=0.05ohm, Resistance Tolerance=±1%, Resistor Case Style=2512[6432Metric], Resistor Element Type=MetalStrip, Temperature Coefficient=±75ppm/°C, Automotive Qualification Standard=AEC-Q200, Datasheet URL=http://www.vishay.com/docs/30100/wsl.pdf, Datasheet Version=07/2016, Manufacturer URL=http://www.vishay.com/, Mounting Technology=SurfaceMount, MSL=MSL1-Unlimited, Packaging=CutTape, Product Range=WSLSeries, SVHC=NoSVHC(15-Jun-2015)
R6: library part RES, Manufacturer="Vishay Dale", Part Number=CRCW0402180KFKED
R7: library part CMP-2002-05244-1, Manufacturer=Bourns, Part Number=CR0402-FX-4992GLF
R8: library part RES, Manufacturer="Vishay Dale", Part Number=CRCW040220K0FKED
R10: library part "RES 2.21K OHM 1% 1/10W 0603", "2.21 kOhms ±1% 0.1W, 1/10W Chip Resistor 0603 (1608 Metric) Automotive AEC-Q200, Moisture Resistant Thick Film", Case/Package=0603, Case Code (Metric)=1608, Manufacturer=Yageo, Manufacturer Part Number=AC0603FR-072K21L, Max Operating Temperature=155°C, Max Power Dissipation=100mW, Min Operating Temperature=-55°C, Resistance=2.21kR, Supplier Part Number 1=YAG3586CT-ND, Temperature Coefficient=100ppm/°C, Tolerance=1%, Voltage Rating=50V, Working Voltage=75V, Case Code (Imperial)=0603, ComponentLink1Description=https://datasheet.ciiva.com/12576/pyu-ac-51-rohs-l-2-12576458.pdf, ComponentLink1URL=https://datasheet.ciiva.com/12576/pyu-ac-51-rohs-l-2-12576458.pdf, Composition="Thick Film", Height=0.022inch, Lead Free="Lead Free", Length=0.063inch, Number of Terminations=2, Packaging="Tape and Reel", Power Rating=100mW, Pricing 1="1=0.1, 10=0.029, 100=0.0117, 1000=0.00527, 2500=0.00458 (USD)", Stock 1=11020, Supplier 1=Digi-Key, Termination=SMD/SMT, Weight=7.1E-05oz, Width=0.8mm
R11: library part "RES 47K OHM 1% 1/10W 0603", "RES SMD 47K OHM 1% 1/10W 0603", Case/Package=0603, Case Code (Metric)=1608, Manufacturer 1=Vishay, Manufacturer Part Number 1=CRCW060347K0FKEA, Max Operating Temperature=155°C, Min Operating Temperature=-55°C, Package Quantity=5000, Power Rating=100mW, Resistance=47kR, Temperature Coefficient=100ppm/°C, Tolerance=1%, Voltage Rating=75V, Case Code (Imperial)=0603, ComponentLink1Description=https://datasheet.ciiva.com/11808/0900766b80d98afc-11808694.pdf?src-supplier=RSComponents, ComponentLink1URL=https://datasheet.ciiva.com/11808/0900766b80d98afc-11808694.pdf?src-supplier=RSComponents, ComponentLink2Description=https://datasheet.ciiva.com/16763/70201119-16763141.pdf?src-supplier=Allied+Electronics, ComponentLink2URL=https://datasheet.ciiva.com/16763/70201119-16763141.pdf?src-supplier=Allied+Electronics, ComponentLink3Description=https://datasheet.ciiva.com/16893/dcrcwe3-16893430.pdf?src-supplier=Avnet+Europe, ComponentLink3URL=https://datasheet.ciiva.com/16893/dcrcwe3-16893430.pdf?src-supplier=Avnet+Europe, ComponentLink4Description=https://datasheet.ciiva.com/5548/dcrcwe3-109170-5548727.pdf?src-supplier=Mouser, ComponentLink4URL=https://datasheet.ciiva.com/5548/dcrcwe3-109170-5548727.pdf?src-supplier=Mouser, ComponentLink5Description=https://datasheet.ciiva.com/7777/1720486-7777607.pdf?src-supplier=Element14, ComponentLink5URL=https://datasheet.ciiva.com/7777/1720486-7777607.pdf?src-supplier=Element14, ComponentLink6Description=https://datasheet.ciiva.com/7777/125364-7777562.pdf?src-supplier=Element14, ComponentLink6URL=https://datasheet.ciiva.com/7777/125364-7777562.pdf?src-supplier=Element14, ComponentLink7Description=https://datasheet.ciiva.com/3257/dcrcwe3-3257631.pdf?src-supplier=Avnet, ComponentLink7URL=https://datasheet.ciiva.com/3257/dcrcwe3-3257631.pdf?src-supplier=Avnet, ComponentLink8Description=https://datasheet.ciiva.com/16286/dcrcwe3-16286447.pdf?src-supplier=Future+Electronics, ComponentLink8URL=https://datasheet.ciiva.com/16286/dcrcwe3-16286447.pdf?src-supplier=Future+Electronics, Composition="Thick Film", Contact Plating=Tin, Depth=0.85mm, Height=0.45mm, Lead Free="Lead Free", Length=1.55mm, Military Standard=Not, Mount="Surface Mount", Packaging="Tape and Reel", Pricing 1="1=0.10000, 10=0.03600, 100=0.01460, 1000=0.00654, 2500=0.00568 (USD)", Radiation Hardening=No, REACH SVHC=Unknown, RoHS=Yes, Stock 1=303029, Supplier 1=Digi-Key, Termination=SMD/SMT, Voltage Rating (DC)=75V, Weight=7.1E-05oz, Width=0.85mm
U1: library part CMP-0471-00165-1, "High Efficiency Standalone Nickel Battery Charger, 4.5 to 34 V Vin, 16-pin SOP (FE-16-EPV-BC), 0 to 85 degC, Pb-Free", Float Voltage=Adj, Manufacturer="Linear Technology", Max Charge Current(A)=4, Battery Chemistry="NiCd, NiMH", ComponentLink1Description="Manufacturer URL", ComponentLink1URL=http://www.linear.com/, ComponentLink2Description=Datasheet, ComponentLink2URL=http://cds.linear.com/docs/en/datasheet/4010fb.pdf, ComponentLink3Description="Package Specification", ComponentLink3URL=http://cds.linear.com/docs/en/packaging/05081663__J_FE16(BC).pdf, DatasheetVersion="Rev. B", Mounting Technology="Surface Mount", Number of Cells="1 to 16", PackageDescription="16-Pin Plastic TSSOP, Body 5 x 4.4 mm, Pitch 0.65 mm", PackageReference=FE-16, PackageVersion="Rev. J, 11/2012", PartNumber=LTC4010CFE#PBF, RoHS=TRUE, Type of Charger=Switching, Vin Max(V)=34, Vin Min(V)=4.5
U2: library part "IC Buck boost converter MC34063", "DC/DC converter control circuit, 8-Pin SO, Tape and Reel", Supplier Part Number 1=497-7850-1-ND, Code_IPC=SOIC127P600-8, Code_JEDEC=MS-012-AA, ComponentLink1Description="Manufacturer URL", ComponentLink1URL=http://www.st.com, ComponentLink2Description=Datasheet, ComponentLink2URL=http://www.st.com/internet/com/TECHNICAL_RESOURCES/TECHNICAL_LITERATURE/DATASHEET/CD00001232.pdf, ComponentLink3Description="Package Specification", ComponentLink3URL=http://www.st.com/internet/com/TECHNICAL_RESOURCES/TECHNICAL_LITERATURE/PACKAGE_INFORMATION/CD00004680.pdf, DatasheetVersion=Nov-2007, PackageDescription="8-Pin Small Outline Integrated Circuit 1.27 mm Pitch", PackageReference=SO8, PackageVersion=Dec-2002, Supplier 1=Digi-Key

## Free pads (board coordinates)
  round 106.3 hole 106.3: ""(98.43,-1476.38) ""(98.43,-98.43) ""(1476.38,-1476.38) ""(1476.38,-98.43)

## Via types
v1: diameter 50, hole 28, Top Layer to Bottom Layer, tented both sides, 15 vias
v2: diameter 23.62, hole 11.81, Top Layer to Bottom Layer, 9 vias
v3: diameter 60, hole 30, Top Layer to Bottom Layer, tented both sides, 4 vias
v4: diameter 50, hole 25, Top Layer to Bottom Layer, tented both sides, 1 vias

## Nets (pads, with @x,y where several pads share a name; then routed paths per layer and width w, separated by ;. In a path a pad name is that pad's centre, name@x,y a point inside that pad or via, vN(x,y) a via of type N, cw(c..) or ccw(c..) an arc to the next point about the centre after c; other vN are vias at no path point)
+12: C9.1 D2.2 R2.1 R3.1 R4.1 R9.1 U2.6 Vin.1 | length 2569.4
  Top Layer w10: v1(1295,-620) 1345.51,-670.51 1476.54,-670.51 R3.1 1526.02,-789.07 R4.1 1526.97,-863.99 R2.1
  Top Layer w30: Vin.1 374.02,-144.02 520,-290 570.87,-290 v1(695,-290) ; R9.1 700.28,-295.28 750,-345 ; U2.6 750,-345 ; D2.2 1236.06,-155 1151.06,-70 970,-70 855,-185 C9.1 822.72,-200 830,-200 830,-265 750,-345
  Bottom Layer w10: v1(695,-290) 965,-290 v1(1295,-620)
BAT: BAT.1 C2.1 D1.2 R5.2 R6.2 U1.10 | length 1889.3
  Top Layer w18: R6.2 586.02,-1321.09 U1.10@618.14,-1288.98
  Top Layer w20: R6.2@585,-1453.98 R6.2 ; U1.10@618.14,-1288.98 U1.10 678.98,-1288.98 700,-1310 700,-1362 710.24,-1372.24 743.27,-1372.24 R5.2 1003.15,-1378.98 C2.1@1272.13,-1110 ; D1.2 1290,-508.94 1215,-583.94 1215,-905.65 1280,-970.65 1280,-1102.13 C2.1@1272.13,-1110 ; BAT.1 1414.8,-1110 C2.1 C2.1@1272.13,-1110
BGATE: Q2.3 U1.12 | length 566.4
  Top Layer w20: U1.12@625,-1237.8 U1.12 693.97,-1237.8 846,-1085.77 846,-969 872.4,-942.6 Q2.3
CHRG: LED2.2 U1.2 | length 1238.6
  Top Layer w10: v1(415,-1045) 379.17,-1080.83 379.17,-1144.5 394.97,-1160.3 418.06,-1160.3 U1.2 ; v1(1275,-720) LED2.2
  Bottom Layer w10: v1@416.57,-1056.57 415,-1055 v1(415,-1045) 425,-1045 750,-720 v1(1275,-720)
FAULT: LED3.2 U1.1 | length 1077.3
  Top Layer w10: U1.1 435.53,-1135.43 520,-1050.96 v1(520,-1045) ; v1(1270,-790) 1337.36,-790 1341.65,-794.29 LED3.2
  Bottom Layer w10: v1(520,-1045) 525,-1045 780,-790 v1(1270,-790)
GND: BAT.2 C1.2 C2.2 C3.2 C4.2 C5.2 C6.2 C7.2 C8.2 C9.2 NTC.2 Q2.2 R7.1 R10.2 R11.2 U1.3 U1.4 U1.13 U1.17 U2.2 U2.4 Vin.2 Vout.2 | length 25.6
  Top Layer w10: U1.4 U1.3
  other v1: 670,-1505 270,-1450 1285,-1305 930,-565 1355,-455 1130,-280 715,-100
  other v2: 486.69,-1268.31 530,-1268.31 573.31,-1268.31 486.69,-1225 530,-1225 573.31,-1225 486.69,-1181.69 530,-1181.69 573.31,-1181.69
  other v3: 1183,-1026 291,-1022 373,-905
  other v4: 620,-785
NetC4_1: C4.1 U1.11 | length 105.2
  Top Layer w10: U1.11 741.61,-1263.39 C4.1@745,-1260
NetC7_1: C7.1 U2.3 | length 102.6
  Top Layer w10: C7.1 750,-740 U2.3
NetD3_1: D3.1 L2.2 U2.1 | length 612.3
  Top Layer w30: D3.1 L2.2 610.59,-724.41 650,-685 U2.1
NetL1_1: L1.1 Q1.3 Q2.1 | length 473.8
  Top Layer w30: Q1.3 1000.55,-840.55 1090,-930 1090,-979.29 Q2.1 1089.29,-1053.5 1017.8,-1125 L1.1
NetL2_1: L2.1 R1.2 R9.2 U2.7 | length 599.1
  Top Layer w30: L2.1 297.24,-356.3 R9.2 ; R1.2 R9.2 ; U2.7 700,-373.87 682.43,-356.3 638.04,-356.3 605.55,-356.3 R9.2
NetLED1_1: LED1.1 R2.2 | length 59.9
  Top Layer w10: LED1.1 R2.2
NetLED2_1: LED2.1 R3.2 | length 60
  Top Layer w10: LED2.1 R3.2
NetLED3_1: LED3.1 R4.2 | length 60.9
  Top Layer w10: LED3.1 R4.2
NetR1_1: R1.1 U2.8 | length 148.5
  Top Layer w10: R1.1 596.77,-520 640,-520 650,-510 U2.8
NetR7_2: R7.2 U1.8 | length 60.9
  Top Layer w10: U1.8 418.78,-1373.78 R7.2
NetR10_1: R10.1 R11.1 U2.5 | length 283.4
  Top Layer w10: U2.5 802.61,-452.91 802.61,-397.39 820,-380 880,-380 899.57,-399.57 R10.1 R11.1
READY: LED1.2 U1.16 | length 873.2
  Top Layer w10: v1(640,-1050) 640,-1134.21 U1.16 ; v1(1270,-865) 1334.53,-865 1340.24,-859.29 LED1.2
  Bottom Layer w10: v1(640,-1050) 825,-865 v1(1270,-865)
SENSE: L1.2 R5.1 U1.9 | length 494.6
  Top Layer w10: U1.9 657.91,-1314.57 670.83,-1327.48 670.83,-1380.83 700,-1410 742,-1410 750,-1418 R5.1 750,-1470 761.3,-1481.3 L1.2
TGATE: Q1.1 U1.14 | length 692
  Top Layer w20: U1.14@625,-1186.61 U1.14 708.39,-1186.61 820,-1075 820,-720.59 881.14,-659.45 Q1.1
VBOOST: C8.1 D3.2 U1.15 | length 517.5
  Top Layer w10: D3.2 D3.2@483.19,-904.61 ; C8.1@589.57,-904.61 C8.1@609.17,-885 ; U1.15 U1.15@641.94,-1160.3
  Top Layer w20: C8.1 610,-935 720,-1045 720,-1135 694.7,-1160.3 641.94,-1160.3 U1.15@625,-1160.3
  Top Layer w30: D3.2@483.19,-904.61 C8.1@589.57,-904.61
VCDIV: R8.1 U1.7 | length 252.5
  Top Layer w10: U1.7 418.06,-1289.7 394.97,-1289.7 375,-1309.67 375,-1395 399.13,-1419.13 429.13,-1419.13 R8.1
VCELL: C3.1 C5.1 R6.1 R8.2 U1.6 | length 510.9
  Top Layer w10: U1.6 418.06,-1264.11 392.28,-1264.11 355,-1301.39 355,-1406.02 R8.2 403.98,-1518.98 C3.1 C5.1 530,-1460 R6.1
VLOAD: C1.1 D1.1 D2.1 Q1.2 Q1.4 Vout.1 | length 1033.8
  Top Layer w30: Q1.2 Q1.4 1139.02,-720.98 1160,-700 1160,-585 1202.2,-542.8 D1.1 1202.2,-462.8 1240,-425 C1.1 1235,-405 C1.1@1240,-400 ; D2.1 C1.1@1240,-400 ; Vout.1 1445.83,-390 1250,-390 C1.1@1240,-400
VTEMP: C6.1 NTC.1 U1.5 | length 355.8
  Top Layer w10: NTC.1 255,-1175 295,-1175 335,-1215 335,-1240 ; C6.1 335,-1340 335,-1240 ; U1.5 337.2,-1237.8 335,-1240
pads on no net: BAT. NTC.0 Vin. Vout.
copper on no net:
  other v3: 915,-1010

## Polygon pours and split planes (outlines as drawn)
GND on Bottom Layer "Bottom Layer-GND" (solid, pour order 0): 0,0 1574.8,0 1574.8,-1574.8 0,-1574.8
GND on Top Layer "Top Layer-GND" (solid, pour order 2): 0,0 1574.8,0 1574.8,-1574.8 0,-1574.8

## Keep-outs
Keep-Out Layer:
  the board outline again, w10

## Silkscreen, mask and mechanical layers (free items; w line width, h text height)
Bottom Overlay:
  drawing of 32 lines, arcs and shapes, not listed
  text "+12V" at 425,-215 h30
  text "GND" at 554,-216 h30
  text "VLOAD" at 1541,-308 h30 r90
  text "GND" at 1541,-475 h30 r90
  text "BAT" at 1541,-1022 h30 r90
  text "GND" at 69,-1140 h30 r90
  text "GND" at 1540,-1159 h30 r90
  text "VTEMP" at 319,-1263 h30

## Text inside footprints (layer, text, board x,y; h text height)
NTC: Top Overlay "1" at 37.4,-1173.94 h31.5 r90